# Altium PCB MT9V034.pcbdoc
Units mil, origin at the board's own origin, x right, y up, seen from the top; angles counter-clockwise.
Board outline 1400 x 650 mil, 4 copper layers (Top Layer, Mid-Layer 2, GND, Bottom Layer), stack 30.578 mil thick; 13 components, 35 nets, 112 pads, 68 vias.
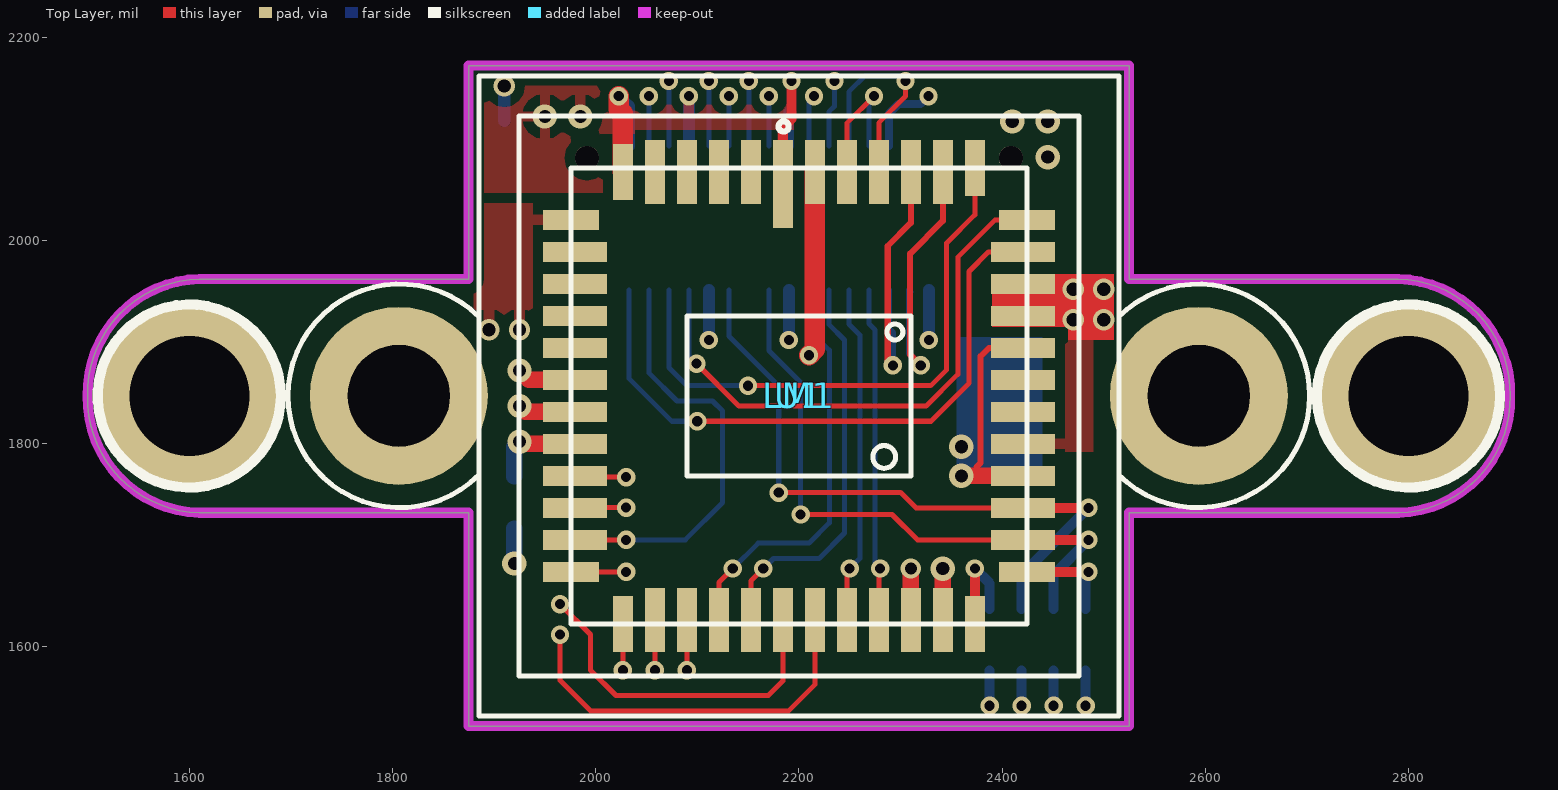
[diagram p0: Top Layer view]
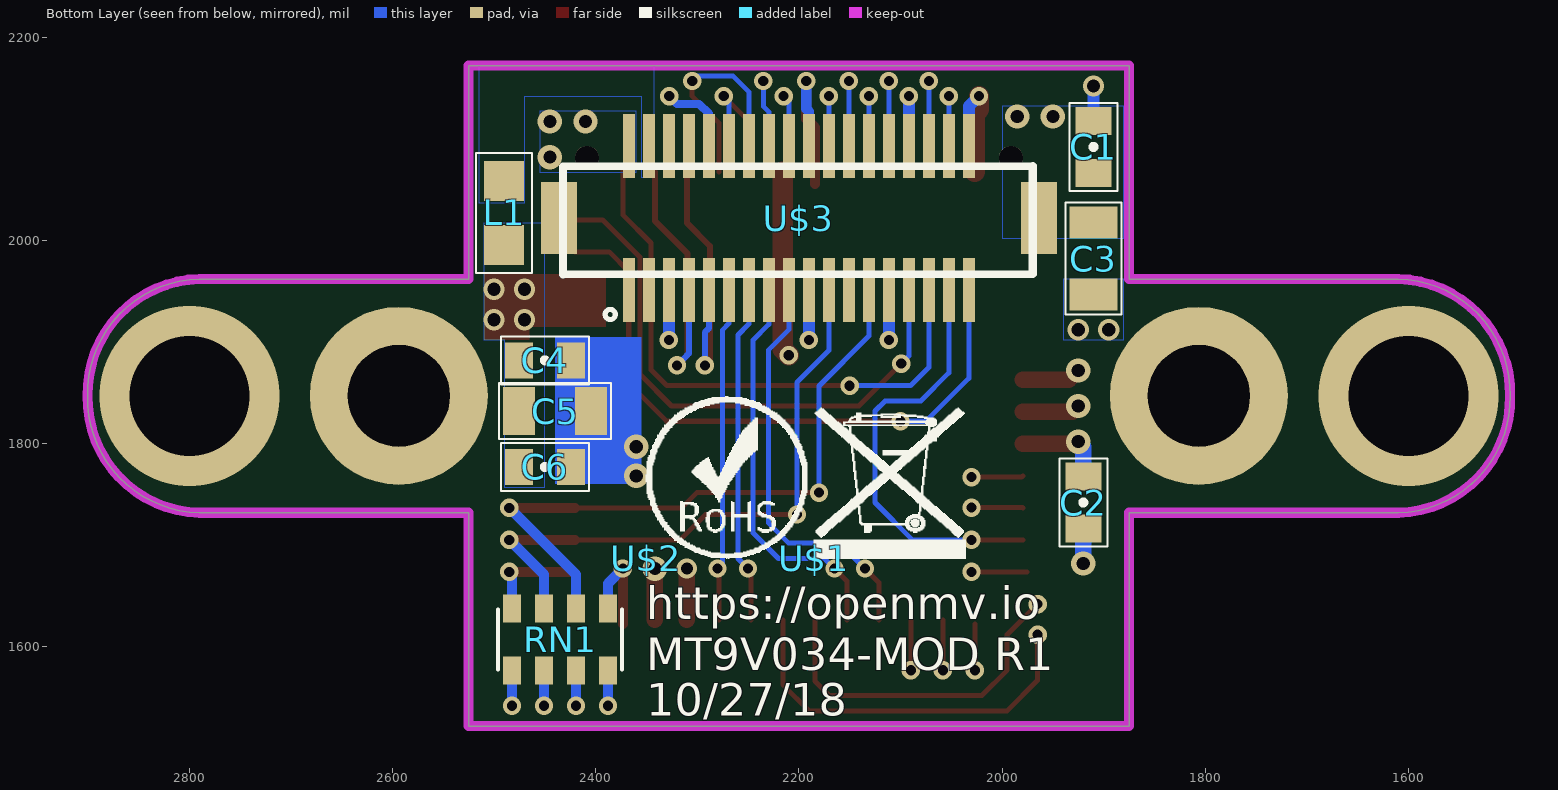
[diagram p1: Bottom Layer view, seen from below]
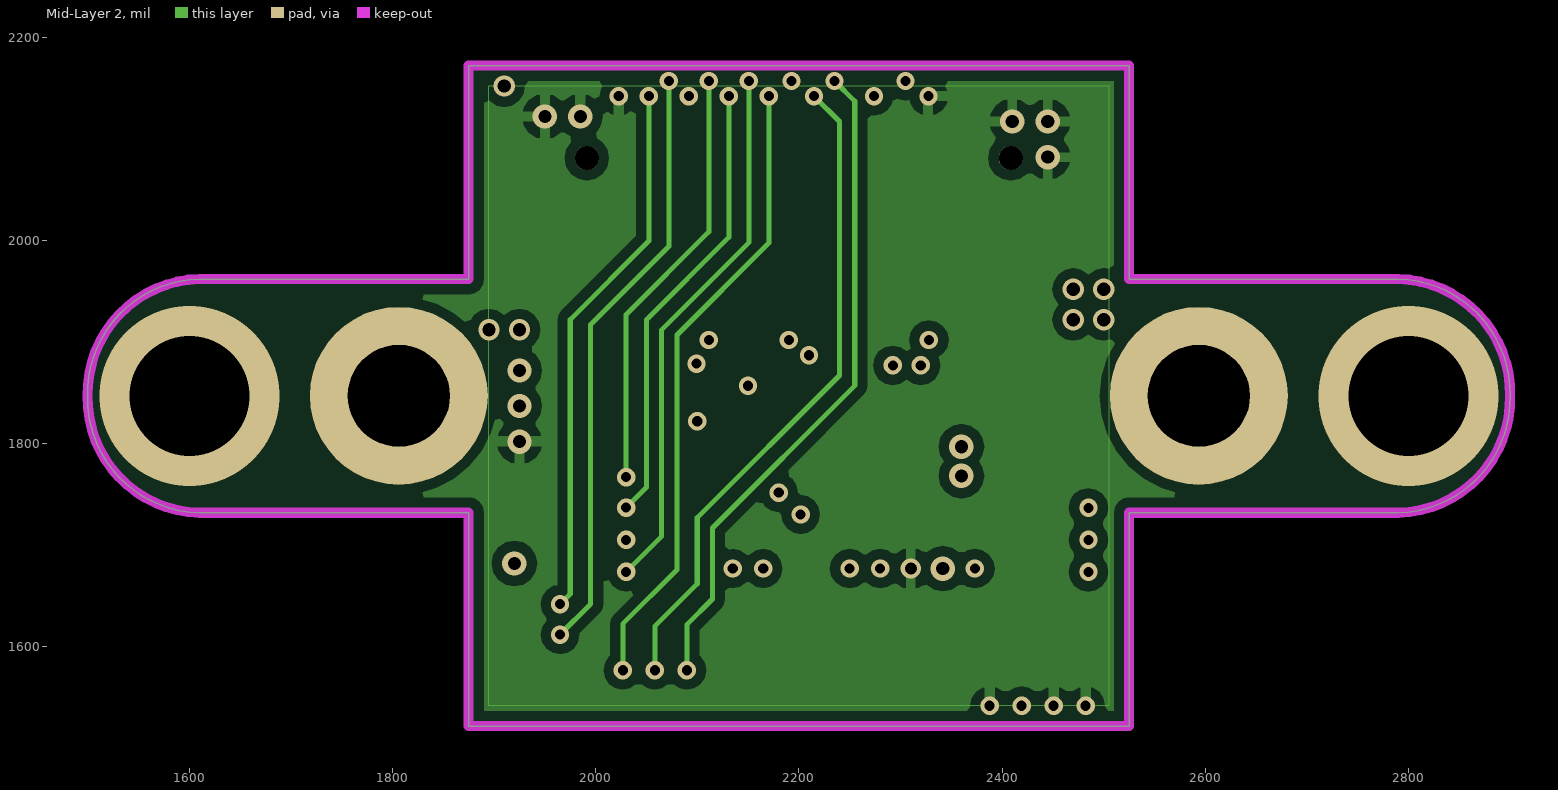
[diagram p2: Mid-Layer 2]
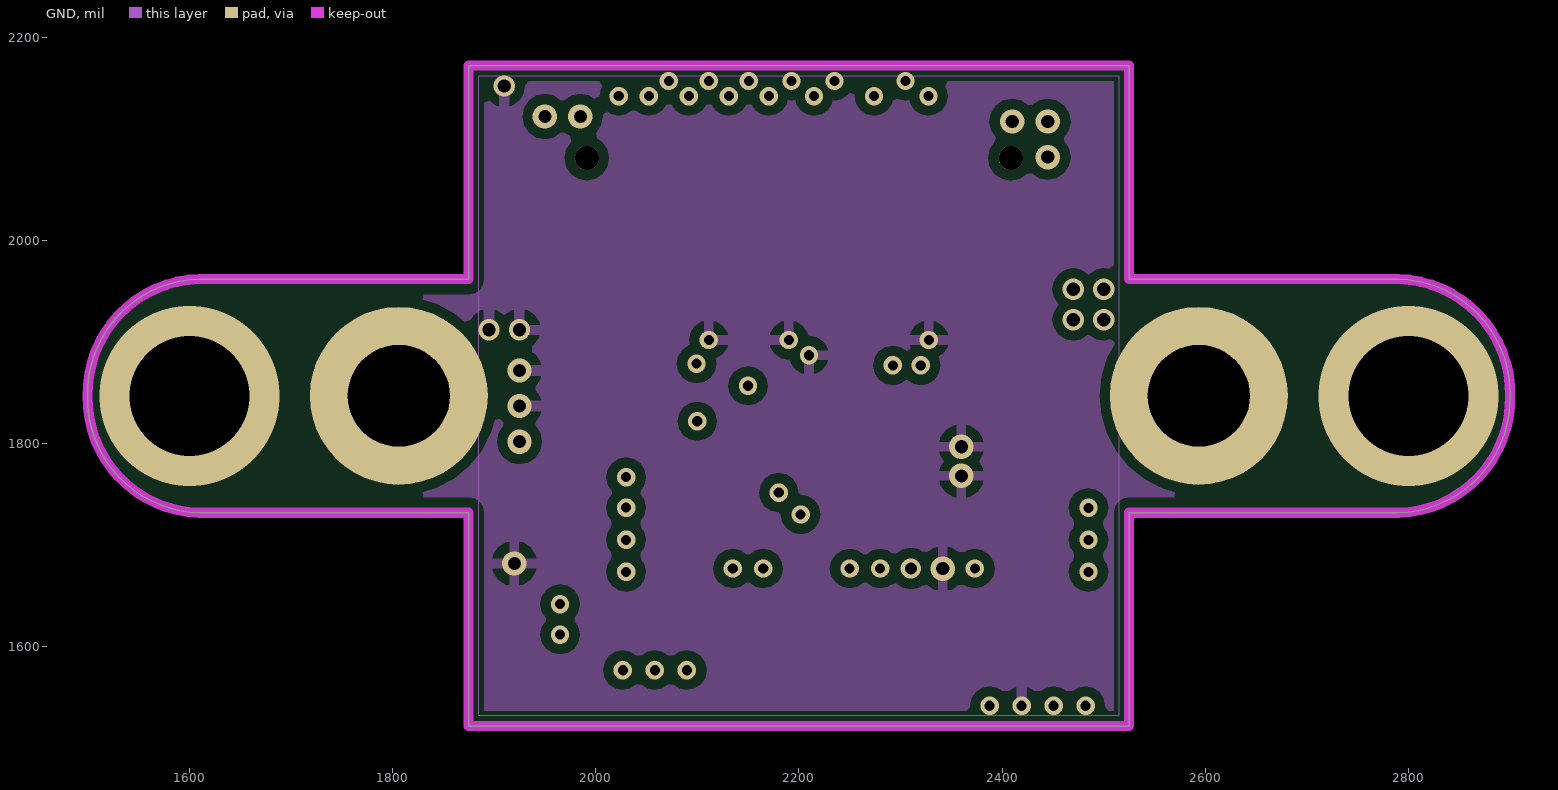
[diagram p3: GND]

## Layer stack, top to bottom
Top Solder: solder mask 0.4, Solder Resist, Dk 3.5
Top Layer: signal copper 1.4
Dielectric1: core 10, FR-4, Dk 4.2
Mid-Layer 2: signal copper 1.4
Dielectric 3: prepreg 5, Dk 4.2
GND: signal copper 1.3779
Dielectric2: core 10, FR-4, Dk 4.2
Bottom Layer: signal copper 1.4
Bottom Solder: solder mask 0.4, Solder Resist, Dk 3.5

## Board outline
1610.03,1732 cw(c1612.53,1844.5) 1500.03,1847 cw(c1612.53,1849.5) 1610.03,1962 1875.03,1962 1875.03,2172 2525.03,2172 2525.03,1962 2790.03,1962 cw(c2787.53,1849.5) 2900.03,1847 cw(c2787.53,1844.5) 2790.03,1732 2525.03,1732 2525.03,1522 1875.03,1522 1875.03,1732

## Design rules (kind name [scope] priority, off if disabled: settings)
Clearance [All] p1: gap=10 ignorepadtopadclearanceinfootprint=FALSE except(0: Arc-Hole Track-Hole SMDPad-Hole THPad-Hole Via-Hole Fill-Hole Poly-Hole Region-Hole Text-Hole)
PolygonConnect [All] p1: connectstyle=Relief reliefconductorwidth=10 reliefentries=4 polygonreliefangle="90 Angle" airgapwidth=10
RoutingVias [All] p1: holewidth=28 width=50 viastyle="Through Hole" minholewidth=28 minwidth=50 maxholewidth=28 maxwidth=50
SolderMaskExpansion [All] p1: expansion=4
Width [All] p1: maxlimit=20 minlimit=20 preferedwidth=20
30 further rules are at their usual default settings.

## Components (designator, comment, footprint, x,y, rotation, side; value= is the part's Value field where it differs from the comment)
C1 "0.1uF" 0402-CAP 1910.03,2092 r90 bottom
C2 "0.1uF" 0402-CAP 1920.03,1742 r270 bottom
C3 "22uF" 0805 1910.03,1982 r90 bottom
C4 "0.1uF" 0402-CAP 2450.03,1882 r180 bottom
C5 "22uF" 0805 2440.03,1832 r0 bottom
C6 "0.1uF" 0402-CAP 2450.03,1777 r180 bottom
L1 "MPZ1608S181ATAH0" 0603 2490.03,2027 r270 bottom
LM1 "LENSMOUNT20MM" LENSMOUNT-20MM 2200.03,1847 r0 top
RN1 "10K" EXBV8V 2435.03,1607 r180 bottom
U1 "MT9V034" CLCC-48 2200.03,1847 r0 top
U$1 "_" WEEE 2185.03,1687 r180 bottom
U$2 "_" ROHS 2350.03,1687 r180 bottom
U$3 "DF12-36-DP" DF12-36-DP 2200.03,2022 r180 bottom

## Footprints (in the part's own frame and the unit in brackets; to place one, negate y for a bottom-side part, rotate by r counter-clockwise, add the part's x,y. Pads: shape width x height; smd on the part's side, far side on the other; paste and mask are expansions set on the pad)
0402-CAP [mm]
  rect 0.7x0.9 smd: 1(-0.65,0) 2(0.65,0)
  silkscreen extent -1.1,-0.6 1.1,0.6
0603 [mm]
  rect 1x1 smd: 1(-0.8,0) 2(0.8,0)
  silkscreen extent -1.5,-0.7 1.5,0.7
0805 [mil]
  rect 31.49x47.24 smd: 1(-35.43,0)
  rect 31.5x47.24 smd: 2(35.43,0)
  silkscreen extent -55,-28 55,28
CLCC-48 [mm]
  rect 0.5x2.2 smd: P$1(-0.4,5.3)
  rect 0.5x1.6 smd: P$2(-1.2,5.6) P$3(-2,5.6) P$4(-2.8,5.6) P$5(-3.6,5.6) P$20(-3.6,-5.6) P$21(-2.8,-5.6) P$22(-2,-5.6) P$23(-1.2,-5.6) P$24(-0.4,-5.6) P$25(0.4,-5.6) P$26(1.2,-5.6) P$27(2,-5.6) P$28(2.8,-5.6) P$29(3.6,-5.6) P$44(3.6,5.6) P$45(2.8,5.6) P$46(2,5.6) P$47(1.2,5.6) P$48(0.4,5.6)
  rect 0.5x1.4 smd: P$6(-4.4,5.6) P$19(-4.4,-5.7) P$30(4.4,-5.7) P$43(4.4,5.7)
  rect 1.4x0.5 smd: P$7(-5.7,4.4) P$18(-5.7,-4.4) P$31(5.7,-4.4) P$42(5.7,4.4)
  rect 1.6x0.5 smd: P$8(-5.6,3.6) P$9(-5.6,2.8) P$10(-5.6,2) P$11(-5.6,1.2) P$12(-5.6,0.4) P$13(-5.6,-0.4) P$14(-5.6,-1.2) P$15(-5.6,-2) P$16(-5.6,-2.8) P$17(-5.6,-3.6) P$32(5.6,-3.6) P$33(5.6,-2.8) P$34(5.6,-2) P$35(5.6,-1.2) P$36(5.6,-0.4) P$37(5.6,0.4) P$38(5.6,1.2) P$39(5.6,2) P$40(5.6,2.8) P$41(5.6,3.6)
  silkscreen extent -5.7,-5.7 5.7,5.7
DF12-36-DP [mil]
  rect 11.81x63 smd: 1(-167.32,-70.87) 3(-147.64,-70.87) 5(-127.95,-70.87) 7(-108.27,-70.87) 9(-88.58,-70.87) 11(-68.9,-70.87) 13(-49.21,-70.87) 15(-29.53,-70.87) 17(-9.84,-70.87) 19(9.84,-70.87) 21(29.53,-70.87) 23(49.21,-70.87) 25(68.9,-70.87) 27(88.58,-70.87) 29(108.27,-70.87) 31(127.95,-70.87) 33(147.64,-70.87) 35(167.32,-70.87)
  rect 11.81x62.99 smd: 2(-167.32,70.87) 4(-147.64,70.87) 6(-127.95,70.87) 8(-108.27,70.87) 10(-88.58,70.87) 12(-68.9,70.87) 14(-49.21,70.87) 16(-29.53,70.87) 18(-9.84,70.87) 20(9.84,70.87) 22(29.53,70.87) 24(49.21,70.87) 26(68.9,70.87) 28(88.58,70.87) 30(108.27,70.87) 32(127.95,70.87) 34(147.64,70.87) 36(167.32,70.87)
  rect 35.44x70.86 smd: F1(-236.22,0) F2(236.22,0)
  round 23.62 hole 23.62 unplated: ""(-208.66,59.05) ""(208.66,59.05)
  silkscreen extent -232,-100 230,51
EXBV8V [mil]
  rect 17.72x27.56 smd: 1(-47.24,-30.51) 2(-15.75,-30.51) 3(15.75,-30.51) 6(15.75,30.51) 7(-15.75,30.51) 8(-47.24,30.51)
  rect 17.71x27.56 smd: 4(47.25,-30.51) 5(47.25,30.51)
  silkscreen extent -61,-30 61,30
LENSMOUNT-20MM [mm]
  round 4.445 hole 2.54 slot 2.545 at 0 deg: P$1(-10,0) P$2(10,0)
  silkscreen extent -12.77,-8 12.77,8
ROHS [mil]
  silkscreen extent 0,-1 158,160
WEEE [mil]
  silkscreen extent -1,-1 150,148

## Via types
v1: diameter 18, hole 10, Top Layer to Bottom Layer, 46 vias
v2: diameter 24, hole 13, Top Layer to Bottom Layer, 12 vias
v3: diameter 21, hole 13, Top Layer to Bottom Layer, 7 vias
v4: diameter 177.16, hole 118.1, Top Layer to Bottom Layer, 2 vias
v5: diameter 20, hole 12, Top Layer to Bottom Layer, 1 vias

## Nets (pads, with @x,y where several pads share a name; then routed paths per layer and width w, separated by ;. In a path a pad name is that pad's centre, name@x,y a point inside that pad or via, vN(x,y) a via of type N, cw(c..) or ccw(c..) an arc to the next point about the centre after c; other vN are vias at no path point)
DCMI_CLK: U1.P$47 U$3.12 | length 136.8
  Top Layer w5: U1.P$47 2247.27,2115.35 v1(2273.93,2142)
  Bottom Layer w5: U$3.12 2268.93,2137 v1(2273.93,2142)
DCMI_D0: U1.P$45 U$3.9 | length 277.7
  Top Layer w6: v1(2292.53,1877) 2287.53,1882 2287.53,1994.5 2310.27,2017.24 U1.P$45
  Bottom Layer w6: U$3.9 2288.61,1913.42 2290.03,1912 2292.53,1909.5 v1(2292.53,1877)
DCMI_D1: U1.P$44 U$3.7 | length 289.6
  Top Layer w6: v1(2320.03,1877) 2309.53,1887.5 2309.53,1987 2341.76,2019.23 U1.P$44
  Bottom Layer w6: U$3.7@2310.03,1949.4 U$3.7 2308.3,1888.73 2310.03,1887 v1(2320.03,1877)
DCMI_D2: U1.P$43 U$3.31 | length 575.5
  Top Layer w5: v1(2150.03,1857) 2329.78,1857 2345.48,1872.7 2345.48,1997.45 2373.26,2025.23 ; U1.P$43 2373.26,2027 ; 2373.26,2025.23 2373.26,2027 ; 2373.26,2025.23 2373.26,2027
  Bottom Layer w5: U$3.31 2072.08,1874.95 2090.03,1857 v1(2150.03,1857)
DCMI_D3: U1.P$42 U$3.29 | length 561.4
  Top Layer w5: v1(2099.26,1878.73) 2140.99,1837 2325.33,1837 2356.48,1868.15 2356.48,1877 2356.48,1983.45 2393.26,2020.23 U1.P$42
  Bottom Layer w5: U$3.29 2091.76,1886.23 v1(2099.26,1878.73)
DCMI_D4: U1.P$41 U$3.35 | length 625.6
  Top Layer w5: v1(2100.03,1822) 2330.03,1822 2367.48,1859.45 2367.48,1969.45 2386.76,1988.73 U1.P$41
  Bottom Layer w5: U$3.35 2032.71,1864.32 2075.03,1822 v1(2100.03,1822)
DCMI_D5: U1.P$15 U$3.28 | length 538.8
  Top Layer w5: U1.P$15 1980.82,1767 v1(2030.03,1767)
  Mid-Layer 2 w5: v1(2030.03,1767) 2030.03,1927 2111.45,2008.42 v1(2111.45,2157)
  Bottom Layer w5: U$3.28 v1(2111.45,2157)
DCMI_D6: U1.P$16 U$3.26 | length 546.6
  Top Layer w5: U1.P$16 1979.79,1737 v1(2030.03,1737)
  Mid-Layer 2 w5: v1(2030.03,1737) 2050.03,1757 2050.03,1922 2131.13,2003.1 v1(2131.13,2142)
  Bottom Layer w5: U$3.26 v1(2131.13,2142)
DCMI_D7: U1.P$17 U$3.33 | length 420.4
  Top Layer w5: U1.P$17 v1(2030.03,1705.27)
  Bottom Layer w5: v1(2030.03,1705.27) 2088.3,1705.27 2125.03,1742 2125.03,1832 2115.03,1842 2080.03,1842 2052.39,1869.64 U$3.33
DCMI_D8: U1.P$18 U$3.24 | length 651.8
  Top Layer w5: U1.P$18 v1(2030.03,1673.77)
  Mid-Layer 2 w5: v1(2030.03,1673.77) 2065.03,1708.77 2065.03,1912 2150.82,1997.79 v1(2150.82,2157)
  Bottom Layer w5: U$3.24 v1(2150.82,2157)
DCMI_D9: U1.P$19 U$3.22 | length 719.2
  Top Layer w5: v1(2026.8,1577) U1.P$19
  Mid-Layer 2 w5: v1(2026.8,1577) 2026.8,1622.59 2080.03,1675.82 2080.03,1907 2170.5,1997.47 v1(2170.5,2142)
  Bottom Layer w5: U$3.22 v1(2170.5,2142)
DCMI_FSIN: U$3.23
DCMI_HSYNC: U1.P$20 U$3.18 | length 751.4
  Top Layer w5: v1(2058.3,1577) U1.P$20
  Mid-Layer 2 w5: v1(2058.3,1577) 2058.3,1620.27 2100.03,1662 2100.03,1727 2240.03,1867 2240.03,2117 v1(2215.03,2142)
  Bottom Layer w5: U$3.18 2209.87,2136.84 v1(2215.03,2142)
DCMI_PCLK: U1.P$46 U$3.14 | length 218.1
  Top Layer w5: U1.P$46 2278.77,2115.74 2305.03,2142 v1(2305.03,2157)
  Bottom Layer w5: U$3.14 2249.24,2146.21 2265.03,2162 2300.03,2162 v1(2305.03,2157)
DCMI_PWDN: RN1.6 U1.P$33 U$3.25 | length 657.4
  Top Layer w5: v1(2180.27,1751.76) 2180.5,1752 2300.03,1752 2315.27,1736.76 U1.P$33
  Top Layer w10: U1.P$33 v1(2485.03,1736.76)
  Bottom Layer w5: U$3.25 2131.13,1905.9 2180.27,1856.76 v1(2180.27,1751.76)
  Bottom Layer w10: RN1.6 2419.28,1671.02 v1(2485.03,1736.76)
DCMI_RST: RN1.7 U1.P$32 U$3.21 | length 609.4
  Top Layer w5: v1(2201.76,1730.27) 2291.76,1730.27 2316.76,1705.27 U1.P$32
  Top Layer w10: U1.P$32 v1(2485.03,1705.27)
  Bottom Layer w5: U$3.21 2170.5,1891.53 2201.76,1860.27 v1(2201.76,1730.27)
  Bottom Layer w10: RN1.7 2450.78,1671.02 v1(2485.03,1705.27)
DCMI_SCL: U1.P$25 U$3.32 | length 1036.1
  Top Layer w5: v1(1965.03,1612) 1965.03,1567 1995.03,1537 2190.03,1537 2215.78,1562.75 U1.P$25
  Mid-Layer 2 w5: v1(1965.03,1612) 1995.03,1642 1995.03,1917 2072.08,1994.05 v1(2072.08,2157)
  Bottom Layer w5: U$3.32 v1(2072.08,2157)
DCMI_SDA: U1.P$24 U$3.34 | length 928.5
  Top Layer w5: v1(1965.03,1642) 1995.03,1612 1995.03,1577 2020.03,1552 2170.03,1552 2184.28,1566.25 U1.P$24
  Mid-Layer 2 w5: v1(1965.03,1642) 1975.03,1652 1975.03,1922 2052.39,1999.36 v1(2052.39,2142)
  Bottom Layer w5: U$3.34 v1(2052.39,2142)
DCMI_VSYNC: U1.P$21 U$3.16 | length 772.7
  Top Layer w5: v1(2089.79,1577) U1.P$21
  Mid-Layer 2 w5: v1(2089.79,1577) 2089.79,1621.76 2115.03,1647 2115.03,1717 2255.03,1857 2255.03,2137 v1(2235.03,2157)
  Bottom Layer w5: U$3.16 2229.56,2126.53 2235.03,2132 v1(2235.03,2157)
GND: C1.2 C2.2 C3.1 C4.2 C5.1 C6.2 RN1.3 U1.P$7 U1.P$12 U1.P$13 U1.P$29 U1.P$34 U1.P$38 U1.P$48 U$3.5 U$3.19 U$3.27 | length 815.3
  Top Layer w6: 2375.03,1777 2378.98,1780.95 2378.98,1885.95 2387.27,1894.24 U1.P$38
  Top Layer w16: v2(1925.03,1837) 1930.78,1831.25 U1.P$13 ; v2(1925.03,1872) 1934.28,1862.75 U1.P$12 ; U1.P$29 v2(2341.76,1677) ; v2(2360.03,1768.26) U1.P$34
  Top Layer w20: v1(2210.03,1887) 2215.78,1892.75 U1.P$48
  Bottom Layer w10: v1(2419.28,1542) RN1.3
  Bottom Layer w12: C1.2 v3(1910.03,2152) ; v1(2111.45,1902) U$3.27 ; v1(2190.19,1902) U$3.19 ; v1(2327.98,1902) U$3.5
  Bottom Layer w16: v2(1920.03,1682) C2.2
  other v2: 2360.03,1797
  other v3: 1895.03,1912 1925.03,1912
N$3: 
  other v4: 1600.03,1847
N$4: 
  other v4: 2800.03,1847
N$19: RN1.5 U1.P$30 | length 99.9
  Top Layer w10: U1.P$30 v1(2373.26,1677)
  Bottom Layer w10: v1(2373.26,1677) 2387.78,1662.47 RN1.5
N$20: RN1.8 U1.P$31 | length 98
  Top Layer w10: U1.P$31 v1(2485.03,1673.77)
  Bottom Layer w10: RN1.8 2482.27,1671.02 v1(2485.03,1673.77)
RSVD1: U$3.1
RSVD2: U$3.3
RSVD5: U$3.6
RSVD6: U$3.8
SPI3_MISO: U1.P$23 U$3.15 | length 395.6
  Top Layer w5: U1.P$23 2152.79,1664.76 v1(2165.03,1677)
  Bottom Layer w5: v1(2165.03,1677) 2175.03,1687 2220.03,1687 2245.03,1712 2245.03,1902 2229.56,1917.47 U$3.15
SPI3_MOSI: U1.P$22 U$3.17 | length 407.3
  Top Layer w5: U1.P$22 2121.29,1663.26 v1(2135.03,1677)
  Bottom Layer w5: v1(2135.03,1677) 2160.03,1702 2210.03,1702 2230.03,1722 2230.03,1892 2209.87,1912.16 U$3.17
SPI3_SCLK: U1.P$26 U$3.13 | length 334.4
  Top Layer w5: U1.P$26 2247.27,1674.24 v1(2250.03,1677)
  Bottom Layer w5: U$3.13 2249.24,1917.79 2260.03,1907 2260.03,1687 v1(2250.03,1677)
SPI3_SSEL: U1.P$27 U$3.11 | length 329.7
  Top Layer w5: U1.P$27 2278.77,1675.74 v1(2280.03,1677)
  Bottom Layer w5: U$3.11 2268.93,1918.1 2275.03,1912 2275.03,1682 v1(2280.03,1677)
VAA: C4.1 C5.2 C6.1 L1.2 U1.P$35 U1.P$39 U1.P$40
  other v3: 2470.03,1922 2500.03,1922 2470.03,1952 2500.03,1952
VCC: C1.1 C2.1 C3.2 RN1.1 RN1.2 RN1.4 U1.P$1 U1.P$6 U1.P$14 U1.P$28 U$3.2 U$3.10 U$3.20 U$3.30 U$3.36 | length 672.6
  Top Layer w10: U1.P$1 2184.28,2111.25 2192.69,2119.66 v1(2192.69,2157)
  Top Layer w16: v2(1925.03,1802) 1927.27,1799.76 U1.P$14 ; U1.P$28 v5(2310.27,1677)
  Top Layer w20: v1(2022.71,2142) 2022.71,2128.96 2026.64,2125.03 2026.64,2067.63 U1.P$6
  Bottom Layer w8: U$3.10 2288.61,2124.73 2298.25,2134.36 2319.9,2134.36 v1(2327.53,2142)
  Bottom Layer w10: U$3.20 2190.03,2093.03 2190.03,2127 2192.69,2129.66 v1(2192.69,2157) ; v1(2387.78,1542) RN1.4 ; v1(2450.78,1542) RN1.2 ; v1(2482.27,1542) RN1.1
  Bottom Layer w12: v1(2022.71,2142) 2032.71,2132 U$3.36 ; U$3.30 v1(2091.76,2142)
  Bottom Layer w16: C2.1 1920.03,1797 v2(1925.03,1802)
  other v2: 2445.03,2082 2410.03,2117 2445.03,2117 1950.03,2122 1985.03,2122
VDDA: L1.1 U$3.4
pads on no net: LM1.P$1 LM1.P$2 U1.P$2 U1.P$3 U1.P$4 U1.P$5 U1.P$8 U1.P$9 U1.P$10 U1.P$11 U1.P$36 U1.P$37 U$3. U$3.F1 U$3.F2

## Polygon pours and split planes (outlines as drawn)
VAA on Bottom Layer "Bottom Layer-VAA" (solid, pour order 10): 2450.03,1757 2450.03,2017 2510.03,2017 2510.03,1902 2490.03,1902 2490.03,1757
VCC on Bottom Layer "Bottom Layer-VCC" (solid, pour order 8): 1880.03,2132 2000.03,2132 2000.03,2002 1880.03,2002
VCC on Bottom Layer "Bottom Layer-VCC 1" (solid, pour order 6): 2360.03,2067 2360.03,2127 2455.03,2127 2455.03,2067
VDDA on Bottom Layer "Bottom Layer-VDDA" (solid, pour order 4): 2342.53,2062 2342.53,2172 2515.03,2172 2515.03,2037 2470.03,2037 2470.03,2142 2355.03,2142 2355.03,2062
GND on Bottom Layer "Bottom Layer-GND" (solid, pour order 2): 1880.03,1962 1940.03,1962 1940.03,1902 1880.03,1902
GND on GND "Top Layer-No Net" (solid, remove dead copper, pour order 26): 1500,2175 2900,2175 2900,1525 1500,1525
GND on GND "Mid-Layer 1-GND" (solid, pour order 12): 1885.03,1532 1885.03,2162 2515.03,2162 2515.03,1532
VCC on Mid-Layer 2 "Top Layer-No Net" (solid, remove dead copper, pour order 28): 1500,2175 2900,2175 2900,1525 1505,1525 1500,1530
VCC on Mid-Layer 2 "Mid-Layer 2-VCC" (solid, pour order 14): 1895.03,1542 1895.03,2152 2505.03,2152 2505.03,1542
VAA on Top Layer "Top Layer-VAA" (solid, pour order 24): 2390.03,1792 2390.03,1812 2450.03,1812 2450.03,1917 2390.03,1917 2390.03,1967 2510.03,1967 2510.03,1902 2490.03,1902 2490.03,1792
VCC on Top Layer "Top Layer-VCC" (solid, pour order 22): 1880.03,2152 2195.03,2152 2195.03,2047 1880.03,2047
GND on Top Layer "Top Layer-GND 2" (solid, pour order 16): 1880.03,2037 2005.03,2037 2005.03,1910 1880.03,1910

## Keep-outs
Keep-Out Layer:
  the board outline again, w10

## Other copper
Top Layer:
  rectangle net VAA: 2465.03,1902 2510.03,1922
  rectangle net VAA: 2390.03,1915 2510,1967
Bottom Layer:
  rectangle net GND: 2355,1760 2440,1905

## Silkscreen, mask and mechanical layers (free items; w line width, h text height)
Top Overlay:
  lines w5: 2295.21,1786.75 cw(c2284.03,1786.88) 2295.21,1787
  lines w6: 2190.02,2111.78 cw(c2185.03,2112.12) 2190.03,2112
  lines w10: 1690.17,1846.78 cw(c1600.03,1846.89) 1690.17,1847 ; 2890.17,1846.78 cw(c2800.03,1846.89) 2890.17,1847
Bottom Overlay:
  text "https://openmv.io" at 2350.03,1627 h32
  text "MT9V034-MOD R1" at 2350.03,1577 h32
  text "10/27/18" at 2350.03,1532 h32